# Altium PCB SSTU V3.0.PcbDoc
Units mm, origin at the board's own origin, x right, y up, seen from the top; angles counter-clockwise.
Board outline 101.25 x 61.25 mm, 2 copper layers (Top Layer, Bottom Layer); 103 components, 79 nets, 359 pads, 81 vias.
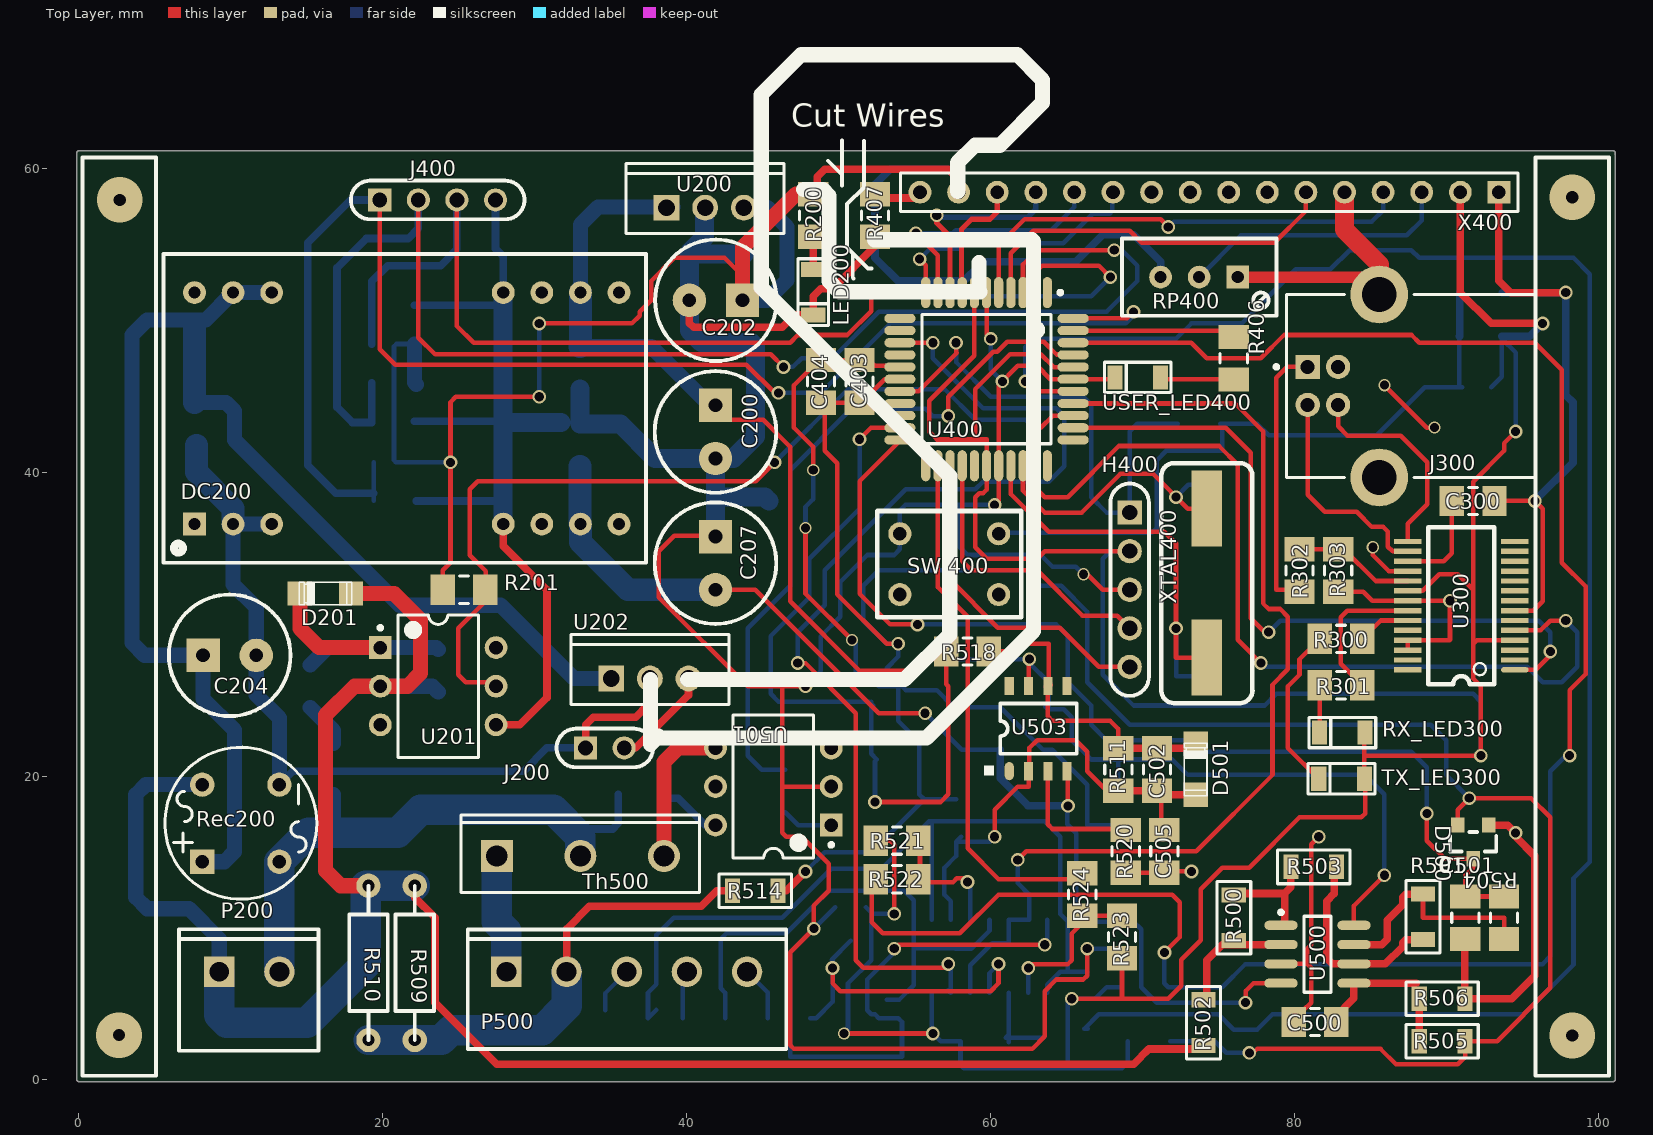
[diagram p0: Top Layer view]
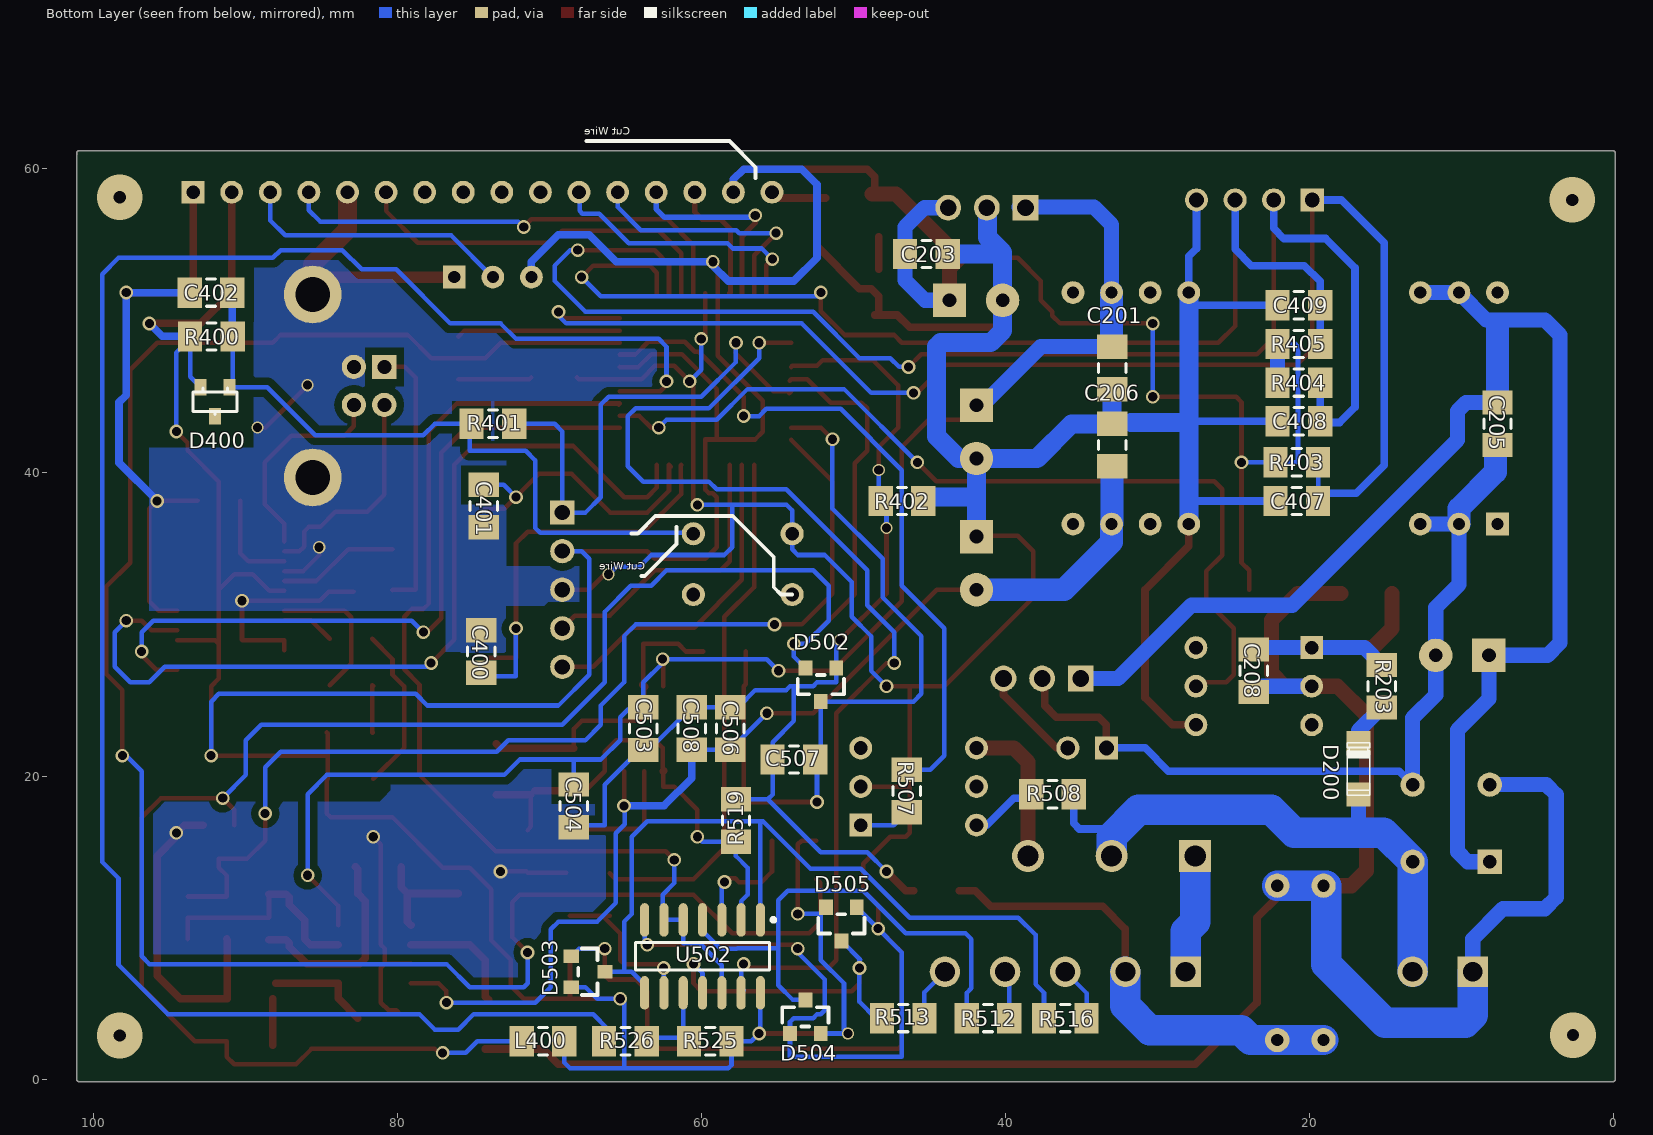
[diagram p1: Bottom Layer view, seen from below]

## Layer stack, top to bottom
Top Layer: signal copper 0.0356
Dielectric: dielectric 0.32, FR-4, Dk 4.8
Bottom Layer: signal copper 0.0356

## Board outline
0,-0.102 cw(c0,0.025) -0.127,0.025 -0.127,61.025 cw(c0,61.025) 0,61.152 101,61.152 cw(c101,61.025) 101.127,61.025 cw(c101,61.025) 101.1,60.946 cw(c101,60.867) 101.127,60.867 101.127,0.025 cw(c101,0.025) 101,-0.102

## Design rules (kind name [scope] priority, off if disabled: settings)
Clearance "Clearance pad to pad" [(IsPad AND IsPad)] p1: gap=0.2
Clearance [InNamedPolygon('Bottom Layer-GND_ANA') Or  InNamedPolygon('Bottom Layer-GND') Or  InNamedPolygon('Bottom Layer-GND')] p2: gap=0.5 // polycon poor clearence
Clearance "Clearance track to track" [(IsTrack AND IsTrack)] p3: gap=0.25
Clearance "Clearance track to pad" [(IsPad AND IsTrack)] p4: gap=0.2
HoleToHoleClearance [All] p1: gap=0.2 allowstackedmicrovias=TRUE
MinimumSolderMaskSliver [All] p1: minsoldermaskwidth=0
PlaneConnect [All] p1: planeconnectstyle=Direct reliefexpansion=0.508 reliefentries=4 reliefconductorwidth=0.254 reliefairgap=0.254
PolygonConnect [All] p1: connectstyle=Direct reliefconductorwidth=0.254 reliefentries=4 polygonreliefangle="90 Angle"
RoutingVias [All] p1: holewidth=0.6 width=0.8 viastyle="Through Hole" minholewidth=0.5 minwidth=0 maxholewidth=2 maxwidth=1.27
SilkToSilkClearance [All] p1: silktosilkclearance=0.1
SilkscreenOverComponentPads [All] p1: minsilkscreentomaskgap=0
SolderMaskExpansion [All] p1: expansion=0.12
Width [All] p1: maxlimit=2 minlimit=0.3 preferedwidth=0.5
23 further rules are at their usual default settings.

## Classes and differential pairs
component class PWR: C200 C201 C202 C203 C204 C205 C206 C207 C208 D200 D201 DC200 J200 LED200 P200 R200 R201 R203 Rec200 U200 U201 U202
component class CTR: C400 C401 C402 C403 C404 C407 C408 C409 D400 H400 J400 L400 R400 R401 R402 R403 R404 R405 R406 R407 RP400 "SW 400" U400 USER_LED400 X400 XTAL400
component class COMM: C300 J300 R300 R301 R302 R303 RX_LED300 TX_LED300 U300
component class ANA_TRIAC: C500 C501 C502 C503 C504 C505 C506 C507 C508 D500 D501 D502 D503 D504 D505 P500 R500 R501 R502 R503 R504 R505 R506 R507 R508 R509 R510 R511 R512 R513 R514 R516 R518 R519 R520 R521 R522 R523 R524 R525 R526 Th500 U500 U501 U502 U503

## Components (designator, comment, footprint, x,y, rotation, side; value= is the part's Value field where it differs from the comment)
C200 "Cap" "Cap Electrolyt 7" 41.91,42.653 r270 top
C201 "Cap 1206" 3216[1206] 32.984,46.869 r90 bottom
C202 "Cap" "Cap Electrolyt 7" 41.938,51.317 r180 top
C203 "Cap 1206" 3216[1206] 45.212,54.365 r0 bottom
C204 "Cap" "Cap Electrolyt 7" 9.934,27.949 r0 top
C205 "Cap 1206" 3216[1206] 7.62,43.189 r90 bottom
C206 "Cap 1206" 3216[1206] 32.984,41.789 r90 bottom
C207 "Cap" "Cap Electrolyt 7" 41.91,34.017 r270 top
C208 "Cap 1206" 3216[1206] 23.658,26.933 r90 bottom
C300 "Cap" 3216[1206] 91.778,38.109 r180 top
C400 "Cap" 3216[1206] 74.506,28.203 r270 bottom
C401 "Cap" 3216[1206] 74.35,37.775 r90 bottom
C402 "Cap" 3216[1206] 92.286,51.825 r180 bottom
C403 "Cap" 3216[1206] 51.392,45.983 r270 top
C404 "Cap" 3216[1206] 48.852,45.983 r270 top
C407 "Cap 1206" 3216[1206] 20.828,38.109 r180 bottom
C408 "Cap 1206" 3216[1206] 20.696,43.361 r180 bottom
C409 "Cap 1206" 3216[1206] 20.696,50.981 r180 bottom
C500 "Cap 1206" 3216[1206] 81.364,3.819 r0 top
C501 "Cap 1206" 3216[1206] 91.27,10.677 r90 top
C502 "Cap 1206" 3216[1206] 70.97,20.439 r270 top
C503 "Cap 1206" 3216[1206] 63.838,23.123 r90 bottom
C504 "Cap 1206" 3216[1206] 68.41,18.043 r90 bottom
C505 "Cap 1206" 3216[1206] 71.458,15.049 r90 top
C506 "Cap 1206" 3216[1206] 58.122,23.131 r270 bottom
C507 "Cap 1206" 3216[1206] 53.932,21.091 r180 bottom
C508 "Cap 1206" 3216[1206] 60.662,23.131 r270 bottom
D200 "LL4148" D_MINIMELF_LL4148 16.764,20.329 r90 bottom
D201 "BZV55C5V1" D_MINIMELF_BZV55C5V1(Primary) 16.256,32.013 r180 top
D400 "BAT54" SOT23 92.022,44.639 r0 bottom
D500 "BAT64-04" SOT23_HIS_Primary 92.794,16.773 r180 top
D501 "BZV55C12V" D_MINIMELF_BZV55C12V(Primary) 73.51,20.439 r90 top
D502 "BAT64-04" SOT23_HIS_Primary 51.138,27.111 r0 bottom
D503 "BAT64-04" SOT23_HIS_Primary 68.58,8.137 r270 bottom
D504 "BAT64-04" SOT23_HIS_Primary 54.186,3.057 r180 bottom
D505 "BAT64-04" SOT23_HIS_Primary 49.784,11.363 r0 bottom
DC200 "TEN 5-2423" DIP24_TRACO 7.66,36.705 r90 top
H400 "HEADER X5" SIP5 69.172,37.347 r270 top
J200 "SIP2" SIP2 33.358,21.853 r0 top
J300 "1-1470156-1" USB2.5-2H4D 81.888,45.681 r0 top
J400 "SIP4" SIP4 19.812,57.921 r0 top
L400 "RES" 3216[1206] 70.442,2.549 r180 bottom
LED200 "LED" LED_1206 49.63,54.321 r270 top
P200 "PWD2S /PHU2" "PWD2S /PHU2" 6.627,1.921 r0 top
P500 "PWD5S /PHU5" "PWD5S/ PHU5" 28.148,7.121 r0 top
R200 "RES" 3216[1206] 48.344,56.905 r270 top
R201 "RES" 3216[1206] 25.36,32.267 r0 top
R203 "RES" 3216[1206] 15.24,25.917 r90 bottom
R300 "Resistor" 3216[1206] 83.078,29.029 r180 top
R301 "Resistor" 3216[1206] 83.078,25.981 r180 top
R302 "Resistor" 3216[1206] 80.348,33.537 r270 top
R303 "Resistor" 3216[1206] 82.888,33.537 r90 top
R400 "RES" 3216[1206] 92.272,48.937 r180 bottom
R401 "RES" 3216[1206] 73.744,43.189 r180 bottom
R402 "RES" 3216[1206] 46.82,38.109 r180 bottom
R403 "RES" 3216[1206] 20.828,40.649 r0 bottom
R404 "RES" 3216[1206] 20.696,45.901 r0 bottom
R405 "RES" 3216[1206] 20.696,48.441 r0 bottom
R406 "Resistor" 3216[1206] 76.03,47.507 r270 top
R407 "RES" 3216[1206] 52.408,56.905 r270 top
R500 "RES" 1206_REFLOW 76.03,10.677 r90 top
R501 "RES" 1206_REFLOW 88.476,10.737 r90 top
R502 "RES" 1206_REFLOW 74.032,3.775 r90 top
R503 "RES" 1206_REFLOW 81.282,14.025 r0 top
R504 "RES" 3216[1206] 93.81,10.677 r90 top
R505 "RES" 1206_REFLOW 89.732,2.553 r180 top
R506 "RES" 1206_REFLOW 89.732,5.347 r180 top
R507 "RES" 3216[1206] 46.5,19.025 r270 bottom
R508 "RES" 3216[1206] 36.914,18.805 r180 bottom
R509 "RES" RA161004 22.119,12.788 r270 top
R510 "RES" RA161004 19.071,12.788 r270 top
R511 "RES" 3216[1206] 68.43,20.439 r90 top
R512 "RES" 3216[1206] 41.148,4.073 r0 bottom
R513 "RES" 3216[1206] 46.736,4.073 r0 bottom
R514 "RES" 1206_REFLOW 44.534,12.455 r0 top
R516 "RES" 3216[1206] 36.068,4.073 r0 bottom
R518 "RES" 3216[1206] 58.504,28.203 r180 top
R519 "RES" 3216[1206] 57.742,17.081 r90 bottom
R520 "RES" 3216[1206] 68.918,15.049 r270 top
R521 "RES" 3216[1206] 53.848,15.757 r180 top
R522 "RES" 3216[1206] 53.848,13.217 r180 top
R523 "RES" 3216[1206] 68.664,9.407 r270 top
R524 "RES" 3216[1206] 66.04,12.201 r90 top
R525 "RES" 3216[1206] 59.436,2.549 r180 bottom
R526 "RES" 3216[1206] 65.024,2.549 r0 bottom
Rec200 "2W10M" WOB_2WXX[X]M 10.668,16.773 r90 top
RP400 "Trimmer" BOURNS3296W 77.808,51.317 r180 top
RX_LED300 "LED" LED_1206 85.638,21.583 r180 top
"SW 400" "Tack Button 6x6" "TS Button" 57.35,33.791 r270 top
Th500 "BTA 26-600B" TO247 33.02,14.741 r0 top
TX_LED300 "LED" LED_1206 85.59,18.535 r180 top
U200 "L7805AC-V" SFM-T3/E10.4V_L7805AC-V(Primary) 41.232,57.413 r0 top
U201 "H11G1" DIP-6 23.658,25.917 r0 top
U202 "L7805AC-V" SFM-T3/E10.4V_L7805AC-V(Primary) 37.592,26.425 r0 top
U300 "FT232RL" SSOP28 92.228,27.03 r180 top
U400 "DSPIC30F3014-30I/PT" TQFP-PT44_M 59.75,46.125 r270 top
U500 "TL062MD" SO8_N 81.532,8.275 r0 top
U501 "MOC3023" DIP-6 45.72,19.313 r180 top
U502 "HCF4066BM1" SO14_N 59.944,8.137 r270 bottom
U503 "OP07C" SO8 61.25,20.275 r90 top
USER_LED400 "LED" LED_1206 72.176,44.951 r180 top
X400 "HEADER X16" HDR1X16 93.472,58.429 r180 top
XTAL400 "XTAL" XTAL 74.252,27.928 r90 top

## Footprints (in the part's own frame and the unit in brackets; to place one, negate y for a bottom-side part, rotate by r counter-clockwise, add the part's x,y. Pads: shape width x height; smd on the part's side, far side on the other; paste and mask are expansions set on the pad)
1206_REFLOW [mm]
  rect 1x1.6 smd: 1(-1.5,0) 2(1.5,0)
  silkscreen extent -2.38,-1.11 2.38,1.11
3216[1206] [mm] "Metal Electrode Face (MELF) Resistor; Body 3.2 x 1.8 mm (LxDia)"
  rect 1.6x2 smd: 1(-1.4,0) 2(1.4,0)
  silkscreen extent -0.3,-0.9 0.3,0.9
BOURNS3296W [mm] "BOURNS3296W Trimmer"
  rect 1.5x1.5 hole 0.8: 1(1.524,-1.524)
  round 1.5 hole 0.8: 2(4.064,-1.524) 3(6.604,-1.524)
  silkscreen extent -1.02,-4.06 9.14,1.02
"Cap Electrolyt 7" [mm] "DxH 8x12mm RM3.5"
  rect 2.2x2.2 hole 0.9: 1(-1.75,0)
  round 2.2 hole 0.9: 2(1.75,0)
  silkscreen extent -4,-4 4,4, body extent -4,-4 4,4, height 12
D_MINIMELF_BZV55C5V1(Primary) [mm]
  rect 1.6x1.6 smd: A(-1.67,0) K(1.7,0)
  silkscreen extent -1.72,-0.76 1.73,0.76
D_MINIMELF_BZV55C12V(Primary) [mm]
  rect 1.6x1.6 smd: A(-1.67,0) K(1.7,0)
  silkscreen extent -1.72,-0.76 1.73,0.76
D_MINIMELF_LL4148 [mm]
  rect 1.6x1.6 smd: A(-1.543,0) K(1.827,0)
  silkscreen extent -1.6,-0.76 1.85,0.76
DIP24_TRACO [mm]
  rect 1.5x1.5 hole 0.8: 1(-0.12,0.04)
  round 1.5 hole 0.8: 2(-0.12,-2.5) 3(-0.12,-5.04) 5(-0.12,-22.82) 7(-0.12,-27.9) 8(15.12,-27.9) 9(-0.12,-20.28) 10(15.12,-22.82) 11(-0.12,-25.36) 14(15.12,-25.36) 16(15.12,-20.28) 22(15.12,-5.04) 23(15.12,-2.5) 24(15.12,0.04)
  silkscreen extent -2.66,-29.68 17.66,2.07
DIP-6 [mm] "DIP; 6 Leads; Row Spacing 7.62 mm; Pitch 2.54 mm"
  rect 1.5x1.5 hole 0.9: 1(-3.81,2.54)
  round 1.5 hole 0.9: 2(-3.81,0) 3(-3.81,-2.54) 4(3.81,-2.54) 5(3.81,0) 6(3.81,2.54)
  silkscreen extent -3.93,-4.7 2.65,4.7, body extent -3.55,-4.7 3.55,4.7, height 5.46
HDR1X16 [mm]
  rect 1.5x1.5 hole 0.9: 1(0,0)
  round 1.5 hole 0.9: 2(2.54,0) 3(5.08,0) 4(7.62,0) 5(10.16,0) 6(12.7,0) 7(15.24,0) 8(17.78,0) 9(20.32,0) 10(22.86,0) 11(25.4,0) 12(27.94,0) 13(30.48,0) 14(33.02,0) 15(35.56,0) 16(38.1,0)
  silkscreen extent -1.27,-1.27 39.37,1.27
LED_1206 [mm]
  rect 1x1.6 smd paste-25.4: A(0.972,-1.286) K(3.972,-1.286)
  silkscreen extent 0.27,-2.29 4.67,-0.29
"PWD2S /PHU2" [mm]
  rect 2x2 hole 1.3: 1(2.621,5.2)
  round 2 hole 1.3: 2(6.581,5.2)
  silkscreen extent -0.02,0 9.14,8
"PWD5S/ PHU5" [mm]
  rect 2x2 hole 1.3: 1(0,0)
  round 2 hole 1.3: 2(3.96,0) 3(7.92,0) 4(11.88,0) 5(15.84,0)
  silkscreen extent -2.54,-5.08 18.42,2.79
RA161004 [mm]
  round 1.6 hole 0.8: 1(0,0) 2(10.16,0)
  silkscreen extent 0,-1.27 10.16,1.27
SFM-T3/E10.4V_L7805AC-V(Primary) [mm]
  rect 1.7x1.7 hole 1.1: 1(-2.54,0)
  round 1.7 hole 1.1: 2(2.54,0) 3(0,0)
  silkscreen extent -5.2,-1.7 5.2,2.9
SIP2 [mil]
  rect 60x60 hole 38.19: 1(0,0)
  round 60 hole 38.19: 2(100,0)
  silkscreen extent -75,-50 175,50
SIP4 [mil]
  rect 60x60 hole 38: 1(0,0)
  round 60 hole 38: 2(100,0) 3(200,0) 4(300,0)
  silkscreen extent -75,-50 375,50
SIP5 [mm]
  rect 1.6x1.6 hole 1: 1(0,0)
  round 1.6 hole 1: 2(2.54,0) 3(5.08,0) 4(7.62,0) 5(10.16,0)
  silkscreen extent -1.9,-1.27 12.06,1.27
SO8 [mm]
  oval 1.2x0.6 smd: 1(0.05,0.005)
  rect 1.2x0.6 smd: 2(0.05,-1.265) 3(0.05,-2.535) 4(0.05,-3.805) 5(5.65,-3.805) 6(5.65,-2.535) 7(5.65,-1.265) 8(5.65,0.005)
  silkscreen extent -0.23,-4.44 4.5,1.66
SO8_N [mm] "SOIC, 8-Leads, Body 4.9x3.9mm, Pitch 1.27mm, IPC Medium Density"
  oval 2.2x0.6 smd: 1(-2.4,1.905) 2(-2.4,0.635) 3(-2.4,-0.635) 4(-2.4,-1.905) 5(2.4,-1.905) 6(2.4,-0.635) 7(2.4,0.635) 8(2.4,1.905)
  silkscreen extent -2.52,-2.5 0.9,2.88, body extent -1.95,-2.45 1.95,2.45, height 1.75
SO14_N [mm] "SOIC, 14-Leads, Body 8.7x3.9mm, Pitch 1.27mm, IPC Medium Density"
  oval 2.2x0.6 smd: 1(-2.4,3.81) 2(-2.4,2.54) 3(-2.4,1.27) 4(-2.4,0) 5(-2.4,-1.27) 6(-2.4,-2.54) 7(-2.4,-3.81) 8(2.4,-3.81) 9(2.4,-2.54) 10(2.4,-1.27) 11(2.4,0) 12(2.4,1.27) 13(2.4,2.54) 14(2.4,3.81)
  silkscreen extent -2.52,-4.4 0.9,4.78, body extent -1.95,-4.33 1.95,4.33, height 1.75
SOT23 [mm]
  rect 0.8x1.1 smd: 1(-0.953,-0.953) 2(0,0.953) 3(0.953,-0.953)
  silkscreen extent -1.43,-0.9 1.45,0.85
SOT23_HIS_Primary [mm]
  rect 0.9x1 smd: 1(0,0) 2(2.032,0) 3(1.016,2.21)
  silkscreen extent -0.51,0.46 2.54,1.73
SSOP28 [mm]
  oval 1.8x0.35 smd: 1(-2.29,0.039)
  rect 1.8x0.35 smd: 2(-2.29,-0.611) 3(-2.29,-1.261) 4(-2.29,-1.911) 5(-2.29,-2.561) 6(-2.29,-3.211) 7(-2.29,-3.861) 8(-2.29,-4.511) 9(-2.29,-5.161) 10(-2.29,-5.811) 11(-2.29,-6.461) 12(-2.29,-7.111) 13(-2.29,-7.761) 14(-2.29,-8.411) 15(4.76,-8.411) 16(4.76,-7.761) 17(4.76,-7.111) 18(4.76,-6.461) 19(4.76,-5.811) 20(4.76,-5.161) 21(4.76,-4.511) 22(4.76,-3.861) 23(4.76,-3.211) 24(4.76,-2.561) 25(4.76,-1.911) 26(4.76,-1.261) 27(4.76,-0.611) 28(4.76,0.039)
  silkscreen extent -0.94,-9.36 3.41,0.99
TO247 [mm]
  rect 2.1x2.1 hole 1.4: 1(-5.5,0)
  round 2.1 hole 1.4: 2(0,0) 3(5.5,0)
  silkscreen extent -7.85,-2.4 7.85,2.7
TQFP-PT44_M [mm] "Thin QFP, 44-Leads, Body 10x10mm, Pitch 0.8mm, IPC Low Density"
  oval 2.05x0.6 smd: 1(-5.7,4) 2(-5.7,3.2) 3(-5.7,2.4) 4(-5.7,1.6) 5(-5.7,0.8) 6(-5.7,0) 7(-5.7,-0.8) 8(-5.7,-1.6) 9(-5.7,-2.4) 10(-5.7,-3.2) 11(-5.7,-4) 23(5.7,-4) 24(5.7,-3.2) 25(5.7,-2.4) 26(5.7,-1.6) 27(5.7,-0.8) 28(5.7,0) 29(5.7,0.8) 30(5.7,1.6) 31(5.7,2.4) 32(5.7,3.2) 33(5.7,4)
  oval 0.6x2.05 smd: 12(-4,-5.7) 13(-3.2,-5.7) 14(-2.4,-5.7) 15(-1.6,-5.7) 16(-0.8,-5.7) 17(0,-5.7) 18(0.8,-5.7) 19(1.6,-5.7) 20(2.4,-5.7) 21(3.2,-5.7) 22(4,-5.7) 34(4,5.7) 35(3.2,5.7) 36(2.4,5.7) 37(1.6,5.7) 38(0.8,5.7) 39(0,5.7) 40(-0.8,5.7) 41(-1.6,5.7) 42(-2.4,5.7) 43(-3.2,5.7) 44(-4,5.7)
  silkscreen extent -5.82,-4.25 4.25,4.98, body extent -5,-5 5,5, height 1.2
"TS Button" [mil] "TS button"
  round 60 hole 35.43: 1(-85,-130) 2(72.48,-130) 3(72.48,125.91) 4(-85,125.91)
  silkscreen extent -144,-189 132,185
USB2.5-2H4D [mm] "Connector; USB1.1, Type B, Thru-Hole; 4 Position; Right Angle"
  rect 1.6x1.6 hole 0.92: 1(-1,1.25)
  round 1.6 hole 0.92: 2(-1,-1.25) 3(1,-1.25) 4(1,1.25)
  round 3.8 hole 2.3: 5(3.71,6.02) 6(3.71,-6.02)
  silkscreen extent -3.18,-6.02 13.99,6.02, body extent -2.41,-6.02 13.99,6.02, height 11.1
WOB_2WXX[X]M [mm]
  round 1.6 hole 0.9: 1(-2.413,-2.54) 2(2.667,-2.54) 3(2.667,2.54)
  rect 1.6x1.6 hole 0.9: 4(-2.413,2.54)
  silkscreen extent -4.87,-5 5.13,5
XTAL [mm] "XTAL SMD"
  rect 5x2 smd: 1(-0.127,0) 2(9.673,0)
  silkscreen extent -3.13,-3 12.67,3

## Part data
C200 C202 C204 C207: library part "Cap pol"
D201: "Voltage regulator diode"
D500 D502 D503 D504 D505: "Silicon Schottky Diodes"
J300: "USB 1.1, Right Angle, Thru-Hole, B Type, Receptacle, 4 Position, White"
L400 R200 R201 R203 R400 R401 R402 R403 R404 R405 R407 R500 R501 R502 R503 R504 R505 R506 R507 R508 R509 R510 R511 R512 R513 R514 R516 R518 R519 R520 R521 R522 R523 R524 R525 R526: library part "RES 1"
R300 R301 R302 R303 R406: library part RES1
RP400: library part "Res Trim"
"SW 400": library part "TS-X Button"
U200 U202: "Precision 1A Regulator"
U400: "High-Performance 16-bit Digital Signal Controller, 24 KB Flash, 2 KB SRAM, 1 KB EEPROM, 44-Pin TQFP, Industrial Temperature"
U500: "Low-Power J-FET Dual Bipolar Operational Amplifier"
U502: "Quad Bilateral Switch For Transmission or Multiplexing of Analog or Digital Signals"

## Free pads (board coordinates)
  round 0.8 hole 0.6: 2(50.376,3.057)

## Via types
v1: diameter 0.9, hole 0.6, Top Layer to Bottom Layer, 70 vias
v2: diameter 0.8, hole 0.6, Top Layer to Bottom Layer, 7 vias
v3: diameter 3, hole 0.8, Top Layer to Bottom Layer, 4 vias

## Nets (pads, with @x,y where several pads share a name; then routed paths per layer and width w, separated by ;. In a path a pad name is that pad's centre, name@x,y a point inside that pad or via, vN(x,y) a via of type N, cw(c..) or ccw(c..) an arc to the next point about the centre after c; other vN are vias at no path point)
+5V: C202.1 C203.2 D400.3 D503.2 D504.2 D505.2 H400.2 L400.2 pad.2 R200.1 R201.1 R400.1 R403.2 R404.2 R405.2 R521.2 R523.2 R525.2 RP400.3 RX_LED300.A TX_LED300.A U200.2 U300.4 U300.20 U400.7 U400.28 U400.40 U502.14 X400.2 X400.15 | length 357.7
  Top Layer w0.3: R201.1 23.96,33.537 24.468,34.045 v1(24.468,40.649) 24.468,44.618 24.817,44.967 v1(30.31,44.967) ; v1(30.31,49.793) 36.406,49.793 36.914,50.301 36.914,50.555 37.676,51.317 37.676,52.587 39.2,54.111 42.502,54.111 43.688,52.925 ; pad.2 v1(56.218,3.057) ; R521.2 53.424,15.757 53.678,15.503 v1(53.678,10.931) ; 59.012,42.173 59.012,45.475 61.298,47.761 63.33,47.761 64.191,46.9 65.375,46.9 U400.40@65.4,46.925 ; v1(59.266,53.857) 58.95,53.541 U400.7 58.95,47.675 55.99,44.715 55.99,42.655 56.491,42.154 59.755,42.154 ; 59.774,42.173 59.774,40.499 59.75,40.475 59.75,38.847 59.52,38.617 59.266,38.617 59.012,38.363 59.012,35.061 59.774,34.299 63.076,34.299 63.584,34.807 H400.2 ; v1(65.362,5.343) 71.712,5.343 72.575,6.206 72.575,7.925 73.85,9.2 73.85,12.561 75.268,13.979 77.046,13.979 80.348,17.281 84.412,17.281 84.666,17.535 84.666,19.773 TX_LED300.A 84.618,21.345 ; 68.664,5.343 R523.2 ; RX_LED300.A 84.618,22.821 84.618,21.345 ; U300.20 88.459,32.191 89.551,33.283 90.762,33.283 91.778,32.267 ; U300.4 92.008,28.941 91.778,28.711 ; v1(94.572,42.681) 93.81,41.919 93.81,41.411 91.778,39.379 91.778,32.267 ; 84.618,21.345 v1(92.286,21.345) 92.286,25.917 91.778,26.425 91.778,28.711 ; 91.778,28.711 91.778,32.267
  Top Layer w0.5: R200.1@48.598,58.175 48.598,58.305 48.598,59.445 49.106,59.953 57.234,59.953 57.912,59.275 X400.15 ; X400.2 90.925,58.422 90.925,51.825 92.957,49.793 v1(96.35,49.793)
  Top Layer w1: C202.1 43.688,52.925 43.688,54.789 47.204,58.305 R200.1 ; R200.1@48.598,58.305 R200.1@48.768,58.305
  Bottom Layer w0.3: R405.2 20.916,48.441 20.75,48.275 20.75,40.775 20.876,40.649 R403.2 v1(24.468,40.649) ; v1(30.31,44.967) v1(30.31,49.793) ; D505.2 52.154,11.025 52.154,7.883 50.63,6.359 50.63,3.311 pad.2 D504.2@52.408,3.057 ; D505.2@52.248,10.931 v1(53.678,10.931) ; U502.14 56.134,3.149 56.734,2.549 R525.2 58.036,0.985 58.25,0.771 65.108,0.771 ; D503.2 67.648,6.105 66.886,5.343 v1(65.362,5.343) 65.108,5.089 65.108,0.771 ; L400.2 69.042,1.149 68.664,0.771 65.108,0.771 ; H400.2 67.902,34.807 67.394,34.299 67.394,26.679 69.426,24.647 78.062,24.647 78.824,25.409 91.778,25.409 92.286,24.901 v1(92.286,21.345) ; D400.3 93.672,46.289 R400.1@93.672,48.777 ; R400.1 R400.1@93.672,48.777 ; v1(94.572,42.681) 94.572,47.877 R400.1@93.672,48.777
  Bottom Layer w0.5: X400.15 57.912,59.275 57.234,59.953 53.424,59.953 52.408,58.937 52.408,54.111 53.932,52.587 58.25,52.587 v1@59.266,53.603 ; v1(59.266,53.857) 65.616,53.857 67.394,55.635 69.426,55.635 71.204,53.857 RP400.3 ; R400.1 95.494,48.937 v1(96.35,49.793)
  Bottom Layer w1: R405.2 R404.2 R404.2@22.22,45.777 ; C202.1 45.292,51.317 46.612,52.637 C203.2 46.612,56.138 45.337,57.413 U200.2@44.196,57.413
+5V_ANA: C403.2 C404.2 D500.2 D502.2 L400.1 R505.1 U400.17 | length 129.6
  Top Layer w0.3: v1(53.932,28.711) 53.17,28.711 49.925,31.956 49.925,40.592 49.106,41.411 49.106,44.205 49.484,44.583 51.508,44.583 53.05,46.125 54.1,46.125 U400.17@54.2,46.025 ; v1(77.046,1.787) 77.046,1.533 77.554,2.041 85.682,2.041 86.698,1.025 90.762,1.025 91.27,1.533 91.27,2.553 93.353,2.553 96.858,6.058 96.858,17.281 95.588,18.551 v1(91.524,18.551) 90.762,17.789 D500.2
  Bottom Layer w0.3: D502.2 53.932,27.873 v1(53.932,28.711) 53.17,28.711 51.646,30.235 51.646,32.521 52.662,33.537 62.314,33.537 63.33,32.521 64.661,32.521 66.378,30.804 66.378,26.171 69.172,23.377 88.984,23.377 90,22.361 90,20.075 v1(91.524,18.551) ; L400.1 74.76,2.549 75.522,1.787 v1(77.046,1.787)
+15V: C200.1 C201.2 C503.2 C504.2 DC200.14 U200.1 U500.8 U503.7 | length 101.4
  Top Layer w0.3: C200.1 42.87,43.443 45.042,43.443 46.82,41.665 46.82,31.505 51.392,26.933 v1(54.948,26.933) ; U503.7 v1@62.515,27.642 ; U500.8 83.932,11.467 v1@85.92,13.455
  Bottom Layer w0.3: v1(54.948,26.933) 55.71,27.695 v1(62.568,27.695) 62.568,27.441 63.838,26.171 C503.2 ; C503.2@63.626,24.577 63.81,24.393 64.838,24.393 65.362,23.869 65.362,22.361 66.632,21.091 68.41,21.091 ; C504.2 68.41,21.091 ; v1(85.936,13.471) 85.936,18.805 84.666,20.075 72.982,20.075 71.966,21.091 68.41,21.091
  Bottom Layer w1: C201.2 37.676,48.269 41.542,44.403 C200.1 ; DC200.14 33.02,56.295 34.175,57.45 U200.1@39.116,57.45
  Bottom Layer w1.5: C201.2 33.02,48.305 DC200.14
-15V: C206.1 C207.2 C506.2 C508.2 DC200.11 U500.4 U503.4 | length 73.4
  Top Layer w0.3: C207.2 44.534,32.267 52.662,24.139 v1(55.71,24.139) ; v1(65.108,18.043) U503.4@65.108,20.329 ; v1@76.825,5.1 76.825,5.875 77.32,6.37 U500.4
  Bottom Layer w0.3: v1(55.71,24.139) 58.118,21.731 C506.2 C508.2 ; v1@65.056,17.841 65.056,16.841 65.658,16.239 65.658,11.651 66.886,10.423 69.426,10.423 69.934,9.915 69.934,6.105 70.95,5.089 v1(76.792,5.089)
  Bottom Layer w0.5: C508.2 60.662,19.863 62.482,18.043 v1@65.056,18.043
  Bottom Layer w1.5: C206.1 32.984,36.621 DC200.11 33.02,35.399 36.152,32.267 C207.2
DB0: X400.7
DB1: X400.8
DB2: X400.9
DB3: X400.10
EXTRACTOR: P500.5 R513.1 | length 3.6
  Bottom Layer w0.3: P500.5 45.336,5.773 R513.1
GND: "SW 400.1" C200.2 C201.1 C202.2 C203.1 C206.2 C207.1 C300.1 C400.1 C401.1 C402.1 C407.1 C408.1 C409.1 D503.1 D504.1 D505.1 DC200.9 DC200.16 H400.3 J300.4 J300.5 J300.6 J400.4 LED200.K R303.1 R402.2 R407.2 RP400.1 U200.3 U201.4 U300.7 U300.18 U300.21 U300.25 U300.26 U400.6 U400.29 U400.39 U501.2 U502.7 USER_LED400.K X400.1 X400.5 | length 380.2
  Top Layer w0.3: C207.1 41.854,35.823 39.2,35.823 38.184,34.807 38.184,31.759 44.026,25.917 46.312,25.917 ; 46.312,19.313 U501.2 ; v1(47.836,25.917) 46.312,25.917 ; v1(53.678,8.645) 53.932,8.899 v1(63.584,8.899) ; U400.6@59.75,51.775 59.75,49.055 v1(60.028,48.777) ; v1(60.282,37.855) 60.55,38.123 60.55,45.743 61.806,46.999 63.076,46.999 63.95,46.125 68.092,46.125 USER_LED400.K ; v2(66.124,33.283) 66.378,33.283 67.394,32.267 H400.3 ; v1(66.378,8.645) 66.378,6.867 66.124,6.613 64.346,6.613 63.584,5.851 63.584,2.867 62.758,2.041 47.074,2.041 46.82,2.295 46.82,8.395 v1(48.385,9.96) 48.385,11.48 49.36,12.455 49.36,14.233 47.582,16.011 46.566,16.011 46.312,16.265 46.312,25.917 ; R303.1 84.542,32.137 85.138,31.541 U300.21 v1(90.254,31.541) 90.254,28.965 90.23,28.941 U300.25 U300.26 ; v2(85.174,35.061) 85.174,34.553 86.236,33.491 U300.18 ; v2(85.936,45.729) 88.73,42.935 v2(89.238,42.935) ; C300.1 v1(95.842,38.109) 96.35,37.601 96.35,31.505 95.736,30.891 U300.7
  Top Layer w0.5: U201.4 29.04,23.377 30.818,25.155 30.818,32.267 27.94,35.145 DC200.9 ; C202.2 40.188,49.821 40.47,49.539 46.312,49.539 47.122,50.349 LED200.K ; LED200.K@48.598,50.349 LED200.K ; R407.2 52.408,54.873 49.614,52.079 48.852,52.079 48.344,51.571 LED200.K ; X400.1 93.472,52.603 94.25,51.825 v1(97.874,51.825)
  Top Layer w0.75: RP400.1 84.458,52.841 J300.5
  Top Layer w1.25: X400.5 83.312,55.973 85.598,53.687 J300.5
  Bottom Layer w0.3: v1(47.836,25.917) 48.852,26.933 48.852,29.219 50.122,30.489 50.122,32.775 51.9,34.553 53.678,34.553 54.048,34.923 54.048,35.95 54.048,37.485 54.418,37.855 57.996,37.855 ; D505.1 v1(48.385,9.96) 47.074,8.645 46.82,8.391 46.82,1.533 54.186,1.533 D504.1 54.186,3.819 53.932,4.073 52.662,4.073 52.408,4.327 52.154,4.327 51.9,4.581 51.9,6.613 53.678,8.391 v1(53.678,8.645) ; v1(60.028,48.777) 60.028,46.745 v1(60.79,45.983) ; v1(60.282,37.855) 57.996,37.855 ; v1(63.584,8.899) 63.754,9.069 U502.7 ; v2(66.124,33.283) 65.616,33.791 64.092,33.791 63.33,34.553 58.504,34.553 57.996,35.061 57.996,37.855 ; v1(66.378,8.645) 68.072,8.645 D503.1
  Bottom Layer w0.5: C408.1 27.854,43.361 27.94,43.275 ; C409.1 27.896,50.981 ; C407.1 27.774,38.109 27.94,38.275 ; J400.4 27.432,54.718 27.94,54.21 DC200.16 ; C402.1 v1(97.874,51.825) 97.874,45.076 98.35,44.6 98.35,40.617 v1(95.842,38.109)
  Bottom Layer w1.25: DC200.9 27.94,38.275 27.94,43.275 ; DC200.16 27.94,43.275 ; 31.734,43.275 27.94,43.275 ; C201.1 32.984,44.525 ; 33,44.525 32.984,44.525 ; U200.3@41.175,57.413 41.175,55.45 40.188,54.463 ; C207.1 41.91,38.363 ; C203.1 40.286,54.365 40.188,54.463 ; R402.2 45.166,38.363 41.91,38.363 ; 32.984,44.525 C206.2 35.644,43.189 37.93,40.903 C200.2 ; 40.188,54.463 C202.2 40.188,49.313 40.978,48.523 44.28,48.523 44.534,48.269 44.534,42.353 43.084,40.903 C200.2 ; 41.91,38.363 C200.2
GND_ANA: C403.1 C404.1 C500.1 C501.1 C503.1 C504.1 C505.1 C506.1 C507.1 C508.1 D500.1 D502.1 R402.1 R506.1 R514.2 R519.2 R520.2 U400.16 U500.3 | length 115
  Top Layer w0.3: v2(47.836,36.331) 47.836,35.823 47.836,32.013 v2(50.884,28.965) ; v2(48.344,40.141) 48.344,41.665 47.074,42.935 47.074,45.729 C404.1@48.728,47.383 ; C404.1@48.598,47.383 C404.1@48.728,47.383 ; C403.1@50.884,47.383 C403.1@51.138,47.383 ; U400.16@54.1,46.925 54.026,46.999 52.408,46.999 52.024,47.383 C403.1@51.138,47.383 ; R520.2 C505.1 71.534,13.725 v1(73.236,13.725) ; U500.3 80.845,7.64 ; C500.1@79.964,4.451 80.094,4.581 80.602,4.581 81.11,5.089 81.11,7.375 80.845,7.64 ; v1(81.618,16.011) 81.11,15.503 81.11,8.899 80.845,8.634 80.845,7.64 ; C404.1@48.728,47.383 C404.1 C403.1@51.138,47.383
  Top Layer w0.5: R514.2 46.566,12.455 v1(47.836,13.725) ; C501.1 91.232,9.239 R506.1 94.322,5.347 95.842,6.867 95.842,14.741 94.572,16.011 v1(94.572,16.265) 94.064,16.773 D500.1
  Bottom Layer w0.3: v1(47.836,13.725) 49.106,14.995 52.154,14.995 55.64,18.481 ; v2(47.836,36.331) 47.836,37.725 R402.1 48.344,38.233 v2(48.344,40.141) ; v2(50.884,28.965) 51.138,28.711 D502.1 51.138,26.171 52.408,26.171 52.662,25.917 53.932,25.917 ; R519.2 55.64,18.481 ; C504.1 68.28,16.773 66.378,16.773 66.378,19.42 64.075,21.723 C503.1 63.47,21.723 C508.1 C506.1 57.604,24.531 56.472,25.663 54.44,25.663 54.186,25.917 53.932,25.917 ; 53.932,25.917 53.932,23.631 55.332,22.231 C507.1 55.332,18.789 55.64,18.481
HEATER_1: P500.1 Th500.1 | length 7.9
  Bottom Layer w2: Th500.1 27.52,10.419 28.148,9.791 P500.1
HEATER_2_GND: P500.2 R509.2 R510.2 R514.1 | length 31
  Top Layer w0.5: P500.2 32.108,9.935 33.612,11.439 40.978,11.439 41.994,12.455 R514.1
  Bottom Layer w2: R510.2 R509.2 23.853,2.628 24.5,3.275 30.5,3.275 32.108,4.883 P500.2
NetC204_1: C204.1 C205.2 DC200.22 DC200.23 Rec200.4 U202.1 | length 92.7
  Bottom Layer w1: C205.2 9.686,44.589 10.25,44.025 10.25,42.125 21.124,31.251 27.77,31.251 32.596,26.425 U202.1 ; Rec200.4 9.585,14.36 10.25,15.025 10.25,23.025 8.184,25.091 C204.1 4.326,27.949 3.5,28.775 3.5,49.025 4.5,50.025 8.36,50.025 DC200.23 DC200.22
  Bottom Layer w1.5: C205.2 7.62,49.405
NetC204_2: C204.2 C205.1 DC200.2 DC200.3 J200.1 Rec200.2 U202.3 | length 56.2
  Top Layer w0.5: J200.1 33.358,23.377 33.866,23.885 36.66,23.885 37.422,24.647 37.422,26.255 U202.3
  Bottom Layer w0.5: Rec200.2 14.097,20.329 29.294,20.329 30.818,21.853 J200.1
  Bottom Layer w1: DC200.3 DC200.2 10.16,32.615 11.684,31.091 C204.2 11.684,25.341 13.208,23.817 Rec200.2
  Bottom Layer w1.5: C205.1@7.75,41.775 7.75,40.025 10.16,37.615 DC200.2
NetC208_1: C208.1 D201.A P200.1 R502.1 R509.1 R510.1 Rec200.3 U201.2 | length 138
  Top Layer w0.5: R509.1 22.119,12.01 23.452,10.677 23.452,5.089 27.516,1.025 69.426,1.025 70.442,2.041 ; 70.237,1.836 70.442,2.041 ; R502.1@74.252,2.041 70.442,2.041
  Top Layer w1: D201.A 20.762,32.013 22.5,30.275 22.5,26.775 21.642,25.917 U201.2 18.142,25.917 16.25,24.025 16.25,13.775 17.237,12.788 R510.1
  Bottom Layer w1: Rec200.3 4.415,19.44 3.75,18.775 3.75,12.025 4.5,11.275 7.25,11.275 9.248,9.277 P200.1 ; U201.2 23.274,25.917 C208.1
  Bottom Layer w2: P200.1 9.248,4.277 9.75,3.775 15.026,3.775 18.88,7.629 18.88,12.788 R509.1
NetC208_2: C208.2 D201.K R203.2 U201.1 | length 17.1
  Top Layer w1: D201.K 14.556,29.719 15.818,28.457 U201.1
  Bottom Layer w1: R203.2 16.38,28.457 U201.1 ; U201.1@19.78,28.525 U201.1 ; C208.2 23.534,28.457 U201.1
NetC300_2: C300.2 U300.17 | length 6.6
  Top Layer w0.3: U300.17 89.842,34.141 90.378,34.677 C300.2
NetC400_2: C400.2 U400.30 XTAL400.1 | length 29
  Top Layer w0.3: U400.30@61.35,40.475 61.375,40.45 61.375,39.55 61.35,39.525 61.35,38.565 63.838,36.077 64.853,36.077 71.458,36.077 72.22,35.315 v1(72.22,29.727) 72.22,27.801 XTAL400.1
  Bottom Layer w0.3: v1(72.22,29.727) 72.25,29.697 72.25,26.575 C400.2@74.35,26.575
NetC401_2: C401.2 U400.31 XTAL400.2 | length 19
  Top Layer w0.3: U400.31@62.025,40.35 62.15,40.475 62.15,38.781 63.584,37.347 66.022,37.347 68.562,39.887 70.713,39.887 72.999,37.601 XTAL400.2
  Bottom Layer w0.3: v1(72.22,38.363) 73.032,39.175 C401.2
NetC402_2: "SW 400.4" C402.2 D400.1 R400.2 R401.1 | length 45
  Bottom Layer w0.3: 60.548,35.95 60.605,36.007 70.626,36.007 70.95,36.331 70.95,40.775 71.586,41.411 75.268,41.411 75.268,43.065 R401.1 77.554,43.189 78.316,42.427 85.428,42.427 88.593,45.592 D400.1 ; D400.1@90.872,45.789 R400.2
  Bottom Layer w0.5: R400.2 90.886,48.951 C402.2
NetC407_2: C407.2 J400.1 R403.1 U400.44 | length 95.4
  Top Layer w0.3: J400.1 19.812,48.099 20.828,47.083 43.942,47.083 45.804,45.221 v1(46.058,45.221) ; U400.44@65.4,50.125 68.996,50.125 v1(69.426,50.555)
  Bottom Layer w0.3: C407.2 R403.1 ; v1(46.058,45.221) 48.852,45.221 53.424,49.793 68.918,49.793 69.426,50.301 v1(69.426,50.555)
  Bottom Layer w0.5: C407.2@19.428,38.617 16.908,38.617 15.07,40.455 15.07,55.095 17.896,57.921 J400.1
NetC408_2: C408.2 J400.2 R404.1 U400.3 | length 93.6
  Top Layer w0.3: J400.2 22.352,48.861 23.452,47.761 45.55,47.761 v1(46.382,46.929) ; U400.3@62.15,51.775 62.15,53.675 63.094,54.619 v1(68.156,54.619)
  Bottom Layer w0.3: v1(46.382,46.929) 47.004,46.929 47.582,47.507 49.614,47.507 52.662,50.555 67.648,50.555 69.68,52.587 69.68,53.603 68.664,54.619 v1(68.156,54.619)
  Bottom Layer w0.5: R404.1 19.296,43.275 18,43.275 17,44.275 17,53.45 18.931,55.381 21.674,55.381 22.352,56.059 J400.2
NetC409_2: C409.2 J400.3 R405.1 U400.2 | length 74.8
  Top Layer w0.3: J400.3 24.892,49.623 25.992,48.523 46.82,48.523 47.328,49.031 50.581,49.031 52.154,50.604 v1(52.154,51.825) ; U400.2@62.95,51.775 62.95,53.125 63.428,53.603 67.14,53.603 v1(67.902,52.841)
  Bottom Layer w0.3: v1@52.408,51.571 66.632,51.571 v1(67.902,52.841)
  Bottom Layer w0.5: R405.1 C409.2 19.296,52.571 20.328,53.603 23.828,53.603 24.892,54.667 J400.3
NetC500_2: C500.2 R505.2 R506.2 U500.5 | length 10
  Top Layer w0.5: C500.2@82.634,4.073 83.932,5.371 U500.5 88.037,6.37 ; R505.2@88.232,2.299 R506.2
NetC501_2: C501.2 D500.3 R504.2 U400.22 | length 69.4
  Top Layer w0.3: U400.22@54.1,42.125 51.392,39.417 51.392,32.013 53.424,29.981 v1(55.202,29.981) ; v1(88.73,17.535) 88.73,15.757 89.924,14.563 D500.3 91.778,13.979 91.27,13.471 C501.2 R504.2
  Bottom Layer w0.3: v1(55.202,29.981) 64.346,29.981 65.108,29.219 65.108,26.171 66.632,24.647 66.632,23.377 67.648,22.361 72.728,22.361 73.49,21.599 87.714,21.599 88.73,20.583 v1(88.73,17.535)
NetC502_1: C502.1 D501.K R511.2 R518.1 U503.6 | length 20.5
  Top Layer w0.3: R518.1 61.044,28.203 61.552,28.711 63.838,28.711 63.838,25.978 U503.6 63.785,23.938 64.092,23.631 67.902,23.631 68.43,23.103 R511.2
  Top Layer w0.5: U503.6@63.75,25.89 U503.6 ; U503.6@63.838,25.978 U503.6@63.87,26.01 ; R511.2 C502.1 73.21,21.839 D501.K
NetC502_2: C502.2 C505.2 D501.A R511.1 R519.1 U502.2 U503.2 | length 32.1
  Top Layer w0.3: v1(60.282,16.011) 60.282,17.789 61.806,19.313 62.515,19.313 U503.2 62.568,20.378 62.568,21.853 63.076,22.361 65.616,22.361 66.378,21.599 66.378,20.329 67.668,19.039 R511.1 ; C502.2 71.24,18.769 71.24,16.667 C505.2
  Top Layer w0.5: U503.2@62.5,20.34 U503.2 ; R511.1@68.194,19.275 R511.1 C502.2 ; C502.2@71.24,18.769 D501.A
  Bottom Layer w0.3: U502.2 57.404,11.777 56.98,12.201 56.98,13.979 57.742,14.741 R519.1 ; R519.1@58.072,16.011 R519.1 ; v1(60.282,16.011) 59.952,15.681 R519.1
NetC507_2: C507.2 D502.3 R518.2 U400.21 | length 50.5
  Top Layer w0.3: v1(51.392,42.173) 52.144,42.925 U400.21@54.1,42.925 ; v1(52.408,18.297) 56.726,18.297 57.234,18.805 57.234,25.917 57.104,26.047 R518.2
  Bottom Layer w0.3: v1(51.392,42.173) 51.392,37.601 48.09,34.299 48.09,31.759 45.55,29.219 45.55,25.409 46.058,24.901 52.024,24.901 D502.3@52.154,24.771 ; D502.3 D502.3@52.154,24.771 ; D502.3@52.278,24.647 D502.3@52.154,24.771 ; v1(52.408,18.297) 52.408,20.967 C507.2 52.154,21.469 D502.3@52.154,24.771
NetD200_A: D200.A P200.2 R508.2 Rec200.1 Th500.2 | length 39.8
  Bottom Layer w0.5: 31.25,17.775 32.506,16.519 35.136,16.519 35.514,16.897 R508.2
  Bottom Layer w1: 16.75,16.275 16.764,16.289 D200.A
  Bottom Layer w2: P200.2 Rec200.1 15.123,16.275 16.75,16.275 21,16.275 22.5,17.775 31.25,17.775 33.02,16.005 Th500.2
NetD200_K: D200.K R203.1 | length 3
  Bottom Layer w1: R203.1 16.764,22.993 D200.K
NetD503_3: D503.3 R516.2 U502.1 U502.8 | length 55.6
  Bottom Layer w0.3: R516.2@38,4.605 R516.2 37.468,5.743 38.025,6.3 38.025,9.55 39.152,10.677 46.312,10.677 49.535,13.9 52.837,13.9 55.964,17.027 56.134,17.027 ; U502.1 56.134,17.027 ; U502.8 63.754,6.275 64.6,7.121 65.108,7.121 ; D503.3 65.108,7.121 ; 56.134,17.027 63.584,17.027 64.6,16.011 64.6,10.925 65.108,10.417 65.108,7.121
NetD504_3: D504.3 R512.2 U502.4 | length 33.6
  Bottom Layer w0.3: R512.2 42.548,5.727 42.25,6.025 42.25,9.275 42.636,9.661 46.566,9.661 49.36,12.455 54.326,12.455 54.948,11.833 54.948,6.223 53.992,5.267 D504.3 ; 54.967,8.664 57.663,8.664 57.682,8.645 58.758,8.645 59.944,9.831 U502.4
NetD505_3: D505.3 R513.2 U502.11 | length 22.2
  Top Layer w0.3: v1(49.614,7.375) 49.614,6.359 50.122,5.851 60.028,5.851 60.536,6.359 v1(60.536,7.629)
  Bottom Layer w0.3: R513.2 48.548,4.073 49.614,5.139 49.614,7.883 49.572,7.925 D505.3 ; U502.11 59.944,7.037 v1(60.536,7.629)
NetH400_1: H400.1 R401.2 U400.18 | length 34.7
  Top Layer w0.3: U400.18@54.225,45.2 54.1,45.325 55.275,45.325 57.8,47.85 ; v1(57.742,48.523) 57.75,48.515 57.75,47.875
  Bottom Layer w0.3: v1(57.742,48.523) 57.742,47.253 60.028,44.967 66.124,44.967 66.632,44.459 66.632,38.363 67.648,37.347 H400.1 69.172,42.681 69.68,43.189 R401.2
NetH400_4: H400.4 U400.26 | length 19.2
  Top Layer w0.3: U400.26@58.15,40.475 58.15,34.145 58.758,33.537 63.076,33.537 66.063,30.55 68.349,30.55 H400.4
NetH400_5: H400.5 U400.25 | length 21.8
  Top Layer w0.3: U400.25@57.35,40.475 57.35,32.913 60.494,29.769 64.558,29.769 67.14,27.187 H400.5
NetJ200_2: J200.2 U202.2 | length 6.8
  Top Layer w0.5: J200.2 36.66,21.853 40.132,25.325 U202.2
NetJ300_1: J300.1 R302.2 | length 17.8
  Top Layer w0.3: R302.2@80.348,32.249 80.33,32.267 78.824,32.267 78.824,46.219 79.536,46.931 J300.1
NetJ300_2: J300.2 U300.16 | length 14.6
  Top Layer w0.3: J300.2 80.888,38.515 82.004,37.399 84.106,37.399 85.106,36.399 85.868,36.399 86.168,36.099 86.168,35.1 86.477,34.791 U300.16
NetJ300_3: J300.3 U300.15 | length 14
  Top Layer w0.3: J300.3 82.888,43.015 83.504,42.399 87.004,42.399 88.754,40.649 88.754,37.899 87.468,36.613 U300.15
NetLED200_A: LED200.A R200.2 | length 2.2
  Top Layer w0.5: LED200.A R200.2
NetR201_2: R201.2 U201.5 U400.36 | length 59.7
  Top Layer w0.3: U201.5 27.214,26.171 25.484,26.171 24.976,26.679 24.976,29.727 26.778,31.529 26.778,33.497 25.738,34.538 25.738,38.871 26.27,39.403 44.558,39.403 v1(45.804,40.649) v1@46.058,40.649 ; 63.33,42.935 64.12,43.725 U400.36@65.4,43.725
  Bottom Layer w0.3: v1(45.804,40.649) 50.63,45.475 56.98,45.475 59.012,43.443 62.314,43.443 v1(62.822,42.935)
NetR300_1: R300.1 U300.23 | length 3.5
  Top Layer w0.3: R300.1 85.69,30.241 U300.23
NetR300_2: R300.2 TX_LED300.K | length 11
  Top Layer w0.3: TX_LED300.K 79.586,21.853 79.586,25.901 80.348,26.663 80.348,27.699 R300.2 R300.2@81.628,28.979
NetR301_1: R301.1 U300.22 | length 9.6
  Top Layer w0.3: R301.1 83.06,27.399 83.06,30.455 83.496,30.891 U300.22
NetR301_2: R301.2 RX_LED300.K | length 3.2
  Top Layer w0.3: R301.2@81.628,25.931 R301.2 81.678,22.881 RX_LED300.K
NetR302_1: R302.1 R303.2 U300.19 | length 8
  Top Layer w0.3: R302.1 R303.2 83.266,34.937 85.362,32.841 U300.19
NetR406_1: R406.1 U400.43 | length 10.8
  Top Layer w0.3: U400.43@65.4,49.325 75.612,49.325 R406.1
NetR406_2: R406.2 USER_LED400.A | length 4.9
  Top Layer w0.3: USER_LED400.A 71.334,46.107 R406.2
NetR407_1: R407.1 X400.16 | length 3.7
  Top Layer w0.5: R407.1@51.85,58.051 54.994,58.051 X400.16
NetR500_1: R500.1 R502.2 U500.2 | length 8
  Top Layer w0.5: R502.2 74.252,5.495 74.252,7.883 75.279,8.91 U500.2
NetR500_2: R500.2 R503.1 U500.1 | length 7.5
  Top Layer w0.5: R500.2@76.03,12.275 79.382,12.275 ; U500.1 79.382,10.43 79.382,12.275 ; R503.1 79.782,12.675 79.382,12.275
NetR501_1: R501.1 R503.2 U500.6 | length 13.6
  Top Layer w0.5: R503.2 82.632,13.875 82.632,12.275 82.132,11.775 82.132,8.025 82.517,7.64 U500.6 85.997,7.64 87.132,8.775 87.132,9.025 87.344,9.237 R501.1
NetR501_2: R501.2 R504.1 U500.7 | length 15.2
  Top Layer w0.3: R501.2 88.476,10.677 93.81,10.677 R504.1
  Top Layer w0.5: U500.7 85.767,8.91 86.132,9.275 86.132,10.525 87.132,11.525 87.132,12.025 87.344,12.237 R501.2
NetR507_1: R507.1 U400.41 | length 47
  Top Layer w0.3: v1@56.98,43.697 57.488,43.697 57.234,43.951 57.234,44.967 60.194,47.927 60.448,47.927 61.105,48.584 63.523,48.584 64.357,47.75 65.375,47.75 U400.41@65.4,47.725
  Bottom Layer w0.3: R507.1 44.946,20.425 44.026,21.345 44.026,29.727 46.82,32.521 46.82,40.141 50.854,44.175 55.74,44.175 56.218,43.697 v1(57.234,43.697)
NetR507_2: R507.2 U501.1 | length 3.4
  Bottom Layer w0.3: R507.2 47.352,16.773 U501.1
NetR508_1: R508.1 U501.6 | length 4.4
  Bottom Layer w0.5: R508.1 38.568,18.551 39.454,18.551 41.232,16.773 U501.6
NetR520_1: R520.1 U503.3 | length 8.8
  Top Layer w0.3: U503.3 63.785,16.826 64.092,16.519 68.848,16.519 R520.1
NetR521_1: R521.1 R522.1 U502.3 | length 8.1
  Top Layer w0.3: R521.1@55.37,15.757 55.37,13.719 56.064,13.025 57.542,13.025 57.792,13.275 v1@58.5,13.275
  Bottom Layer w0.3: v1(58.5,13.025) 58.674,12.851 U502.3
NetR522_2: R522.2 U400.42 | length 131.5
  Top Layer w0.3: R522.2 52.2,12.969 52.2,10.377 52.916,9.661 57.996,9.661 60.536,12.201 71.966,12.201 72.474,11.693 72.474,9.407 v1(71.458,8.391) ; U400.42@65.4,48.525 73.234,48.525 74.252,47.507 77.808,47.507 79.332,49.031 87.724,49.031 88.23,48.525 95.84,48.525 97.62,46.745 97.62,34.045 99.175,32.49 99.175,26.71 98.128,25.663 v1(98.128,21.345)
  Bottom Layer w0.3: v1(71.458,8.391) 71.458,6.359 71.712,6.105 75.268,6.105 76.792,7.629 96.35,7.629 96.858,8.137 96.858,20.329 97.874,21.345 v1(98.128,21.345)
NetR523_1: R523.1 R524.1 U502.9 | length 10.7
  Top Layer w0.3: v1(62.5,7.375) 62.754,7.629 65.108,7.629 65.362,7.883 65.362,9.637 R524.1@66.526,10.801 ; R524.1 68.658,10.801 R523.1
  Bottom Layer w0.3: U502.9 62.5,5.753 v1(62.5,7.375)
NetR524_2: R524.2 U400.24 | length 34.6
  Top Layer w0.3: U400.24@56.55,40.475 56.55,32.443 58.504,30.489 58.504,15.249 60.536,13.217 65.656,13.217 R524.2
NetR525_1: R525.1 R526.1 U502.10 | length 6.1
  Bottom Layer w0.3: R525.1@61.214,2.489 U502.10 ; R525.1@61.214,2.997 61,2.783 R526.1@63.5,2.783
NetR526_2: R526.2 U400.38 | length 126.9
  Top Layer w0.3: v1@62.314,45.729 62.718,45.325 U400.38@65.4,45.325
  Bottom Layer w0.3: v1(62.314,45.983) 62.314,48.269 62.822,48.777 72.22,48.777 73.236,49.793 76.538,49.793 80.094,53.349 82.38,53.349 83.65,54.619 87.714,54.619 88.222,54.111 98.382,54.111 99.45,53.043 99.45,14.345 98.382,13.277 98.382,7.582 95.127,4.327 78.57,4.327 77.554,3.311 76.03,3.311 75.014,4.327 67.14,4.327 66.17,3.357 R526.2@66.424,3.357
NetTh500_3: Th500.3 U501.4 | length 10
  Top Layer w1: Th500.3 38.52,20.919 39.454,21.853 U501.4
NetU300_1: U300.1 U400.35 | length 48.3
  Top Layer w0.3: U400.35@65.4,42.925 75.5,42.925 77.15,41.275 77.15,30.385 78.062,29.473 v1(78.316,29.473) ; U300.1 95.9,26.991 96.858,27.949 v1(96.858,28.203)
  Bottom Layer w0.3: v1(78.316,29.473) 79.078,30.235 96.096,30.235 96.858,29.473 v1(96.858,28.203)
NetU300_5: U300.5 U400.32 | length 59.4
  Top Layer w0.3: U400.32@62.95,40.475 62.95,38.997 63.584,38.363 65.088,38.363 68.45,41.725 75.05,41.725 76.284,40.491 76.284,28.965 v1(77.808,27.441) ; U300.5 96.214,29.591 96.858,30.235 v1(97.874,30.235)
  Bottom Layer w0.3: v1(77.808,27.441) 78.062,27.187 95.334,27.187 96.35,26.171 97.62,26.171 98.636,27.187 98.636,29.473 v1(97.874,30.235)
NetU400_4: U400.4 X400.6 | length 25.6
  Top Layer w0.3: U400.4@61.35,51.775 61.35,54.425 62.814,55.889 69.172,55.889 69.953,55.108 78.683,55.108 80.772,57.197 X400.6
  Top Layer w0.5: X400.6@80.772,57.947 X400.6
NetU400_5: U400.5 X400.4 | length 31
  Top Layer w0.3: U400.5@60.55,51.775 60.55,54.95 62.251,56.651 71.204,56.651 v1(71.712,56.143)
  Bottom Layer w0.3: v1(71.712,56.143) 72.069,56.5 85.109,56.5 85.852,57.243 X400.4
  Bottom Layer w0.35: X400.4@85.85,58.427 X400.4
NetU400_8: U400.8 X400.14 | length 8.4
  Top Layer w0.35: U400.8@58.15,51.775 58.1,51.825 58.1,55.993 58.758,56.651 59.976,56.651 60.452,57.127 X400.14
NetU400_9: U400.9 X400.13 | length 13.4
  Top Layer w0.35: v1(56.472,56.905) 56.475,56.4 57.35,55.525 U400.9@57.35,51.775
  Bottom Layer w0.35: v1(56.472,56.905) 56.472,56.903 56.6,56.775 62.438,56.775 62.992,57.329 X400.13
NetU400_10: U400.10 X400.12 | length 16.7
  Top Layer w0.3: v1(55.1,55.74) 56.55,54.29 U400.10@56.55,51.775
  Bottom Layer w0.3: v1(55.1,55.74) 57.537,55.74 57.722,55.925 64,55.925 65.532,57.457 X400.12
NetU400_11: U400.11 X400.11 | length 17.6
  Top Layer w0.3: v1(55.35,54.025) 55.75,53.625 U400.11@55.75,51.775
  Bottom Layer w0.3: v1(55.35,54.025) 56.05,54.725 57.95,54.725 58.3,55.075 64.802,55.075 66.752,57.025 67.85,57.025 68.032,57.207 X400.11@68.032,58.429
NetU400_14: U400.14 U502.13 | length 72.1
  Top Layer w0.3: v1(47.328,27.441) 47.836,27.441 51.138,24.139 51.138,7.883 51.646,7.375 56.98,7.375 v1(57.234,7.629) ; U400.14@54.098,48.523 54.1,48.525 54.102,48.523 v1(56.218,48.523)
  Bottom Layer w0.3: v1(47.328,27.441) 47.328,29.473 49.106,31.251 49.106,33.537 54.44,38.871 59.012,38.871 59.52,39.379 63.838,39.379 64.854,40.395 64.854,43.697 64.346,44.205 59.52,44.205 56.218,47.507 v1(56.218,48.523) ; U502.13@57.234,5.907 U502.13 57.404,7.459 v1(57.234,7.629)
NetU400_37: U400.37 U502.5 U502.6 U502.12 | length 68.8
  Top Layer w0.3: v1(61.806,14.487) 62.368,15.049 73.544,15.049 78.57,20.075 78.57,26.016 79.586,27.032 79.586,30.489 79.078,30.997 78.316,30.997 77.95,31.363 77.95,42.7 76.125,44.525 65.4,44.525 U400.37@65.466,44.459
  Bottom Layer w0.3: U502.12 58.674,7.545 60.118,8.989 61.214,8.989 U502.5 62.568,10.537 62.568,12.201 61.806,12.963 v1(61.806,14.487)
STAND: P500.4 R512.1 | length 3.2
  Bottom Layer w0.3: R512.1 39.748,6.841 P500.4
TC: P500.3 R516.1 | length 3.1
  Bottom Layer w0.3: R516.1@34.668,4.581 34.668,5.721 P500.3
V0: RP400.2 X400.3 | length 18.1
  Bottom Layer w0.3: RP400.2 76.496,55.593 87.418,55.593 88.392,56.567 X400.3
pads on no net: "SW 400.2" "SW 400.3" D400.2 DC200.1 DC200.5 DC200.7 DC200.8 DC200.10 DC200.24 U201.3 U201.6 U300.2 U300.3 U300.6 U300.8 U300.9 U300.10 U300.11 U300.12 U300.13 U300.14 U300.24 U300.27 U300.28 U400.1 U400.12 U400.13 U400.15 U400.19 U400.20 U400.23 U400.27 U400.33 U400.34 U501.3 U501.5 U503.1 U503.5 U503.8
copper on no net:
  other v3: 98.3,2.925 2.65,2.95 2.7,57.925 98.3,58.1

## Polygon pours and split planes (outlines as drawn)
GND on Bottom Layer "Bottom Layer-GND" (solid, remove dead copper, pour order 1001): 56.85,60.969 96.35,60.969 96.35,54.759 96.35,20.089 95.64,19.313 82.631,19.313 82.158,19.83 82.158,22.418 82.158,22.677 80.503,24.488 80.266,24.746 73.88,24.746 73.407,24.746 72.461,25.781 71.278,27.075 71.041,27.075 71.041,30.439 70.095,31.473 56.613,31.473 54.011,31.473 53.065,32.508 51.646,34.061 51.646,59.675 51.646,60.193 52.356,60.969 56.85,60.969
GND_ANA on Bottom Layer "Bottom Layer-GND_ANA" (solid, remove dead copper, pour order 1000): 51.138,29.981 68.028,29.981 68.028,25.155 69.519,23.631 78.957,23.631 79.454,23.123 80.199,22.361 80.448,22.107 80.448,19.059 80.944,18.551 81.193,18.297 95.351,18.297 95.848,17.789 96.096,17.535 96.096,1.787 95.351,1.025 75.48,1.025 74.735,1.025 73.99,1.787 73.493,2.295 73.493,5.089 73.493,5.343 69.27,9.661 69.022,9.915 65.544,9.915 65.048,10.423 65.048,12.455 65.048,12.709 64.551,13.217 64.494,13.275 53.87,13.275 52.572,13.275 51.883,13.979 51.138,14.741 51.138,29.981

## Other copper
Top Layer:
  text ".layer_Name" at 111.725,52.2 h1.52
Bottom Layer:
  pour cut-out: 72.885,31.2 72.885,25.521 72.91,25.496 72.904,25.49 68.715,25.49 68.715,31.2
  pour cut-out: 72.85,44.689 67.24,44.689 67.24,38.694 67.755,38.18 67.755,33.8 72.85,33.8
  pour cut-out: 79.078,30.891 79.062,30.875 76.85,30.875 76.85,28.175 75.85,28.175 75.85,25.303 79.822,25.303 80.075,25.05 80.075,21.875 89.75,21.875 90.275,21.35 90.275,19.15 96.683,19.15 96.858,18.975 97,19.117 97,30.875 79.094,30.875
  pour cut-out: 66.124,48.777 71.966,48.777 72.982,49.793 76.538,49.793 80.348,53.603 82.634,53.603 83.65,54.619 83.65,54.873 84.752,54.873 89.425,54.875 89.496,41.6 97.086,41.6 97.112,50.555 97.112,61.223 52.154,61.223 50.63,59.699 55.71,54.619 63.838,54.619 63.838,54.111 66.124,51.825
  pour cut-out: 50.376,37.855 62.822,37.855 62.822,29.769 50.418,29.769 50.376,29.727
  pour cut-out: 56.472,20.837 60.662,20.837 60.79,20.709 60.79,17.281 56.472,17.281
  pour cut-out: 50.462,29.769 50.11,14.995 65.87,14.995 65.87,29.769
  text ".layer_Name" at 112,42.825 h1.52

## Silkscreen, mask and mechanical layers (free items; w line width, h text height)
Top Overlay:
  lines w0.25: 49.325,60.5 50.225,59.6 50.225,59.4 ; 50.95,54.325 50.95,52.8 51,52.75
  lines w0.254: 50.225,58.875 50.225,61.825 ; 50.5,54.85 51.95,53.4 52.175,53.4 ; 50.575,54.8 50.575,57.65 51.675,58.75 51.675,61.8 ; 0.254,0.275 0.254,60.715 5.08,60.715 5.08,0.275 0.254,0.275 ; 95.885,0.275 100.711,0.275 100.711,60.715 95.885,60.715 95.885,0.275
  lines w1: 37.625,26.35 37.625,22.1 38.15,22.625 38.15,22.5 55.8,22.5 62.85,29.55 62.85,55.2 62.75,55.3 52.375,55.3 ; 40.075,26.35 54.35,26.35 57.325,29.325 57.325,39.75 44.925,52.15 44.925,64.85 47.55,67.475 61.775,67.475 63.425,65.825 63.425,64.325 60.625,61.525 59,61.525 57.85,60.375 57.85,58.5 ; 47.725,58.6 48.975,58.6 49.375,58.2 49.375,52.575 50.075,51.875 59.325,51.875 ; 59.25,51.9 59.25,53.8
  text "Cut Wires" at 52.175,102.75 h1.52
  text "Cut Wires" at 46.9,62.75 h1.52
  text ".layer_Name" at 111.725,48.975 h1.52
Bottom Overlay:
  lines w0.25: 54.05,31.95 54.775,31.95 55.25,32.425 55.25,34.425 57.95,37.125 63.05,37.125 64.2,35.975 64.625,35.975 ; 56.45,59.375 56.45,60.075 58.175,61.8 67.6,61.8 ; 61.65,36.4 61.65,35.275 63.75,33.175 63.95,33.175
  text "Cut Wire" at 64.7,62.2 h0.5
  text ".layer_Name" at 111.875,45.75 h1.52
  text "Cut Wire" at 63.7,33.575 h0.5
Board:
  lines w0.254: 101,60.867 101,0.025 0,0.025 0,61.025 101,61.025
  text ".layer_Name" at 112.175,39.55 h1.52

## Dimensions
101,61.406 to 95.925,61.35 on Dimensions
0,61.025 to 5.08,60.715 on Dimensions
101,61.025 to 0,61.025 on Dimensions
0,61.025 to 0,0.025 on Dimensions